# Altium PCB main.PcbDoc (part 16 of 16)
Units mil, origin at the board's own origin, x right, y up, seen from the top; angles counter-clockwise.
Board outline 8394.75 x 5164.44 mil, 7 copper layers (Top Layer 1, Layer 2, Layer 3, Unused, Layer 4_pow, Layer 5_gnd, Bottom 6+gnd), stack 64.043 mil thick; 364 components, 409 nets, 1932 pads, 1061 vias.
Unrouted connection lines stored in the file: 2.
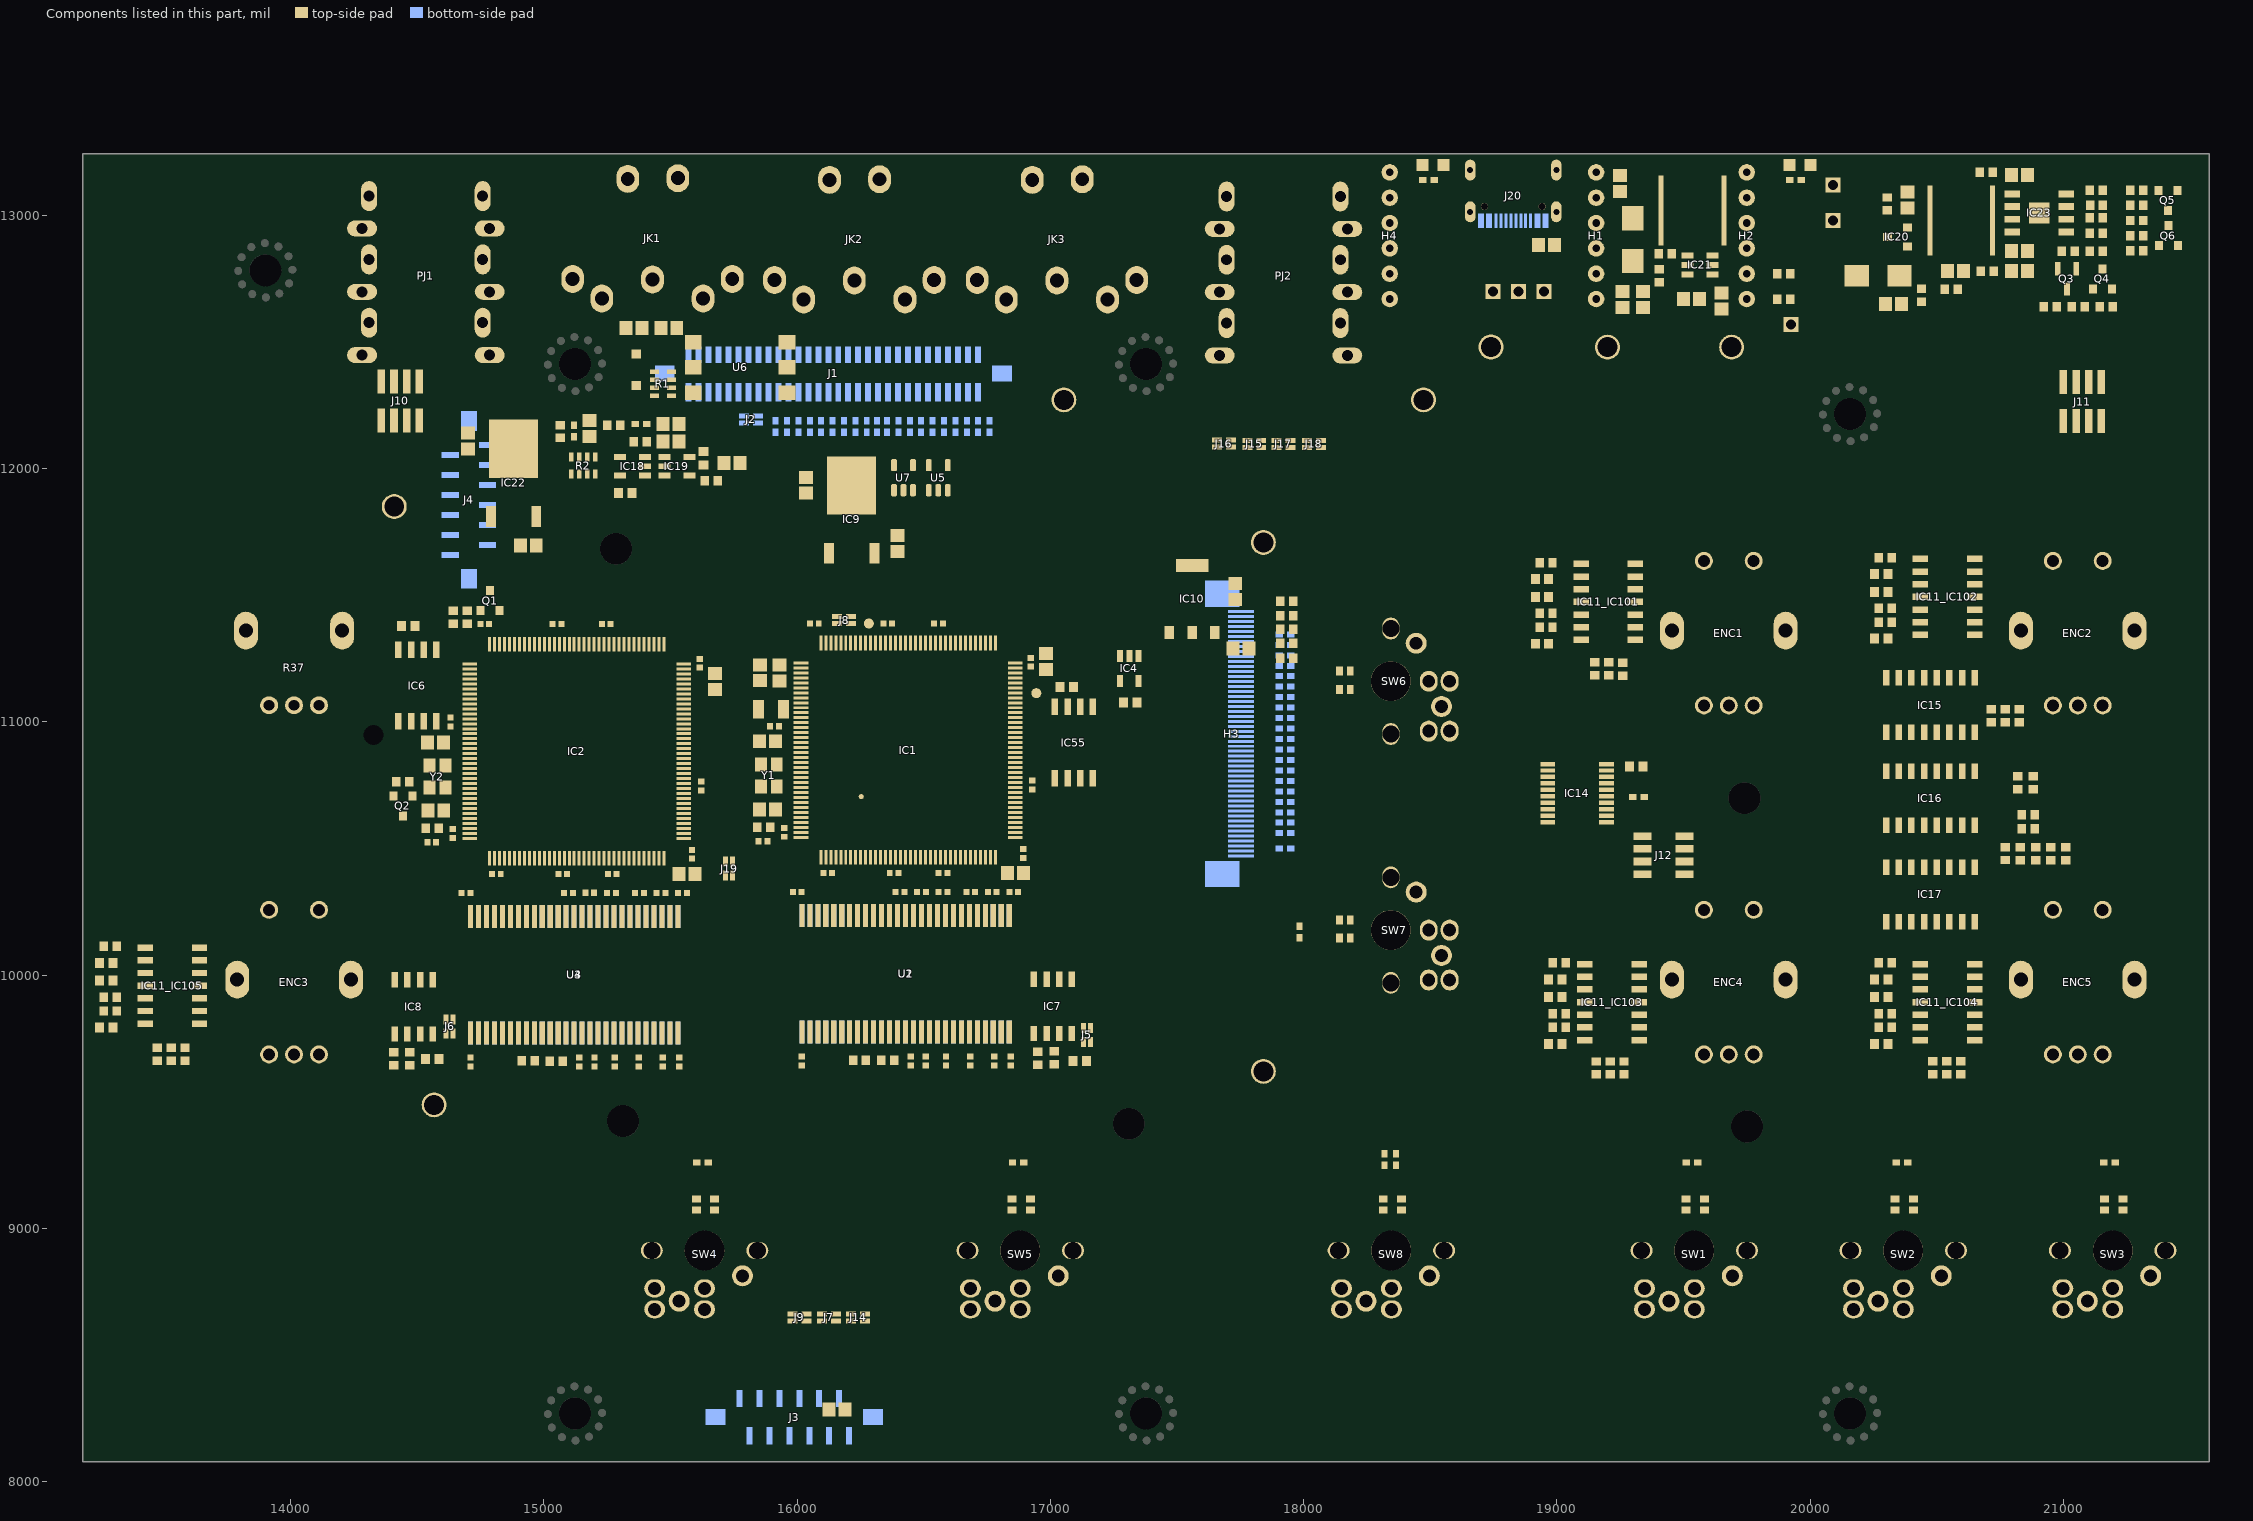
[diagram p19: the components of this part, seen from the top]

## Silkscreen, mask and mechanical layers (free items; w line width, h text height) (continued)
Bottom Overlay:
  circle w15: c18473.25,12271.89 r88.03
  circle w15: c17053.25,12271.89 r88.03
  circle w15: c14409.45,11850.39 r88.03
  circle w15: c14566.93,9488.19 r88.03
  circle w15: c17841.03,9620.49 r88.03
  circle w15: c17841.01,11708.99 r88.03
  lines w5: 15222.49,11575.81 15347.5,11575.81 ; 15222.49,11575.81 15347.5,11792.34 ; 15222.49,11575.81 15205.74,11604.82 15159.98,11684.07 15222.49,11792.34 ; 15222.49,11575.84 15347.5,11575.84 ; 15222.49,11575.84 15347.5,11792.38 ; 15222.49,11575.84 15205.74,11604.85 15159.98,11684.11 15222.49,11792.38 ; 15222.49,11792.34 15347.5,11792.34 ; 15222.49,11792.34 15347.5,11575.81 ; 15222.49,11792.38 15347.5,11792.38 ; 15222.49,11792.38 15347.5,11575.84 ; 15250.69,9315.82 15375.7,9532.36 ; 15250.69,9315.82 15375.7,9315.82 ; 15250.69,9315.82 15233.94,9344.83 15188.18,9424.09 15250.69,9532.36 ; 15250.69,9532.36 15375.7,9315.82 ; 15250.69,9532.36 15375.7,9532.36 ; 15347.5,11575.81 15410.01,11684.07 15347.5,11792.34 ; 15347.5,11575.84 15410.01,11684.11 15347.5,11792.38 ; 15375.7,9315.82 15438.21,9424.09 15375.7,9532.36 ; 17246.83,9305.34 17371.84,9305.34 ; 17246.83,9305.34 17371.84,9521.88 ; 17246.83,9305.34 17230.08,9334.35 17184.32,9413.61 17246.83,9521.88 ; 17246.83,9521.88 17371.84,9305.34 ; 17246.83,9521.88 17371.84,9521.88 ; 17371.84,9305.34 17434.35,9413.61 17371.84,9521.88 ; 19625.99,9403.02 19688.5,9511.29 ; 19625.99,9403.02 19671.75,9323.76 19688.5,9294.75 ; 19625.99,9402.98 19671.75,9323.72 19688.5,9294.71 ; 19625.99,9402.98 19688.5,9511.25 ; 19678.42,10590.59 19803.44,10807.13 ; 19678.42,10590.59 19803.44,10590.59 ; 19678.42,10590.59 19661.67,10619.6 19615.91,10698.86 19678.42,10807.13 ; 19678.42,10807.13 19803.44,10807.13 ; 19678.42,10807.13 19803.44,10590.59 ; 19688.5,9294.71 19813.52,9511.25 ; 19688.5,9294.71 19813.52,9294.71 ; 19688.5,9294.75 19813.52,9511.29 ; 19688.5,9294.75 19813.52,9294.75 ; 19688.5,9511.25 19813.52,9511.25 ; 19688.5,9511.25 19813.52,9294.71 ; 19688.5,9511.29 19813.52,9511.29 ; 19688.5,9511.29 19813.52,9294.75 ; 19803.44,10590.59 19865.94,10698.86 19803.44,10807.13 ; 19813.52,9294.71 19876.03,9402.98 ; 19813.52,9294.75 19876.03,9403.02 ; 19813.52,9511.25 19876.03,9402.98 ; 19813.52,9511.29 19876.03,9403.02 ; 13775.38,12783.41 13837.88,12891.68 13962.9,12891.68 14025.41,12783.41 13962.9,12675.14 13837.88,12675.14 13821.13,12704.15 13775.38,12783.41 ; 14997.87,12413.03 15043.63,12333.77 15060.37,12304.76 15185.39,12304.76 15247.9,12413.03 15185.39,12521.29 15060.37,12521.29 14997.87,12413.03 ; 14997.98,8269.72 15043.74,8190.47 15060.49,8161.46 15185.51,8161.46 15248.02,8269.72 15185.51,8377.99 15060.49,8377.99 14997.98,8269.72 ; 17252.68,12413.03 17298.44,12333.77 17315.19,12304.76 17440.21,12304.76 17502.71,12413.03 17440.21,12521.29 17315.19,12521.29 17252.68,12413.03 ; 17252.98,8270 17298.74,8190.74 17315.49,8161.73 17440.51,8161.73 17503.02,8270 17440.51,8378.27 17315.49,8378.27 17252.98,8270 ; 18653.24,12477.11 18676.36,12540.95 18738.24,12572.11 18803.98,12540.95 18828.21,12480.3 18803.24,12417.11 18743.45,12392.33 18678.24,12417.11 18653.24,12477.11 ; 19113.08,12476.8 19136.2,12540.63 19198.08,12571.8 19263.82,12540.63 19288.05,12479.99 19263.08,12416.8 19203.29,12392.01 19138.08,12416.8 19113.08,12476.8 ; 19603.08,12476.8 19626.2,12540.63 19688.08,12571.8 19753.82,12540.63 19778.05,12479.99 19753.08,12416.8 19693.29,12392.01 19628.08,12416.8 19603.08,12476.8 ; 20032.46,8269.72 20078.22,8190.47 20094.97,8161.46 20219.99,8161.46 20282.5,8269.72 20219.99,8377.99 20094.97,8377.99 20032.46,8269.72 ; 20032.46,12215.72 20094.97,12323.99 20219.99,12323.99 20282.5,12215.72 20219.99,12107.45 20094.97,12107.45 20078.22,12136.46 20032.46,12215.72
  lines w10: 18279.81,12380 18279.81,13239.99 19829.81,13239.99 19829.81,12380 18279.81,12380
Board Shape:
  lines w10: 13180.25,8079.59 13180.25,8670.67 13180.25,13244.04 21496.06,13244.04 21575,13244.04 21575,8079.59 21496.06,8079.59 13180.25,8079.59 ; 18274.81,12549.99 19824.81,12549.99 19824.81,13244.99 18274.81,13244.99 18274.81,12549.99
Mechanical 3:
  circle w7.87: c16279.76,8913.11 r125.02
  circle w7.87: c18939.51,8913.11 r125.02
  circle w7.87: c13698.79,8913.11 r125.02
  circle w7.87: c14013.79,10698.88 r125.02
  circle w7.87: c13708,12275.94 r125.02
  circle w0.5: c13708,12275.94 r59.06
  circle w0.5: c20205.5,11839.94 r125.02
  circle w0.5: c18344.49,11708.99 r125.02
  circle w0.5: c18344.49,11708.99 r59.06
  circle w0.5: c18344.49,9549 r59.06
  circle w0.5: c18344.49,9549 r125.02
  circle w0.5: c20205.5,11839.94 r59.06
  circle w0.5: c13698.79,8913.11 r59.06
  circle w0.5: c21109.8,10698.88 r125.02
  circle w0.5: c21109.8,10698.88 r59.06
  circle w0.5: c19740.92,10698.88 r125.02
  circle w0.5: c18939.51,8913.11 r59.06
  circle w0.5: c17655.66,8913.11 r125.02
  circle w0.5: c17655.66,8913.11 r59.06
  circle w0.5: c16279.76,8913.11 r59.06
  circle w0.5: c14013.79,10698.88 r59.06
  circle w0.5: c20751.86,9440.57 r59.06
  lines w0.5: 13180.25,8079.59 21507.89,8079.59 21507.89,13244.04 13180.25,13244.04 13180.25,8079.59 ; 20626.84,9440.57 20672.6,9361.31 20689.35,9332.3 20814.37,9332.3 20876.87,9440.57 20814.37,9548.84 20689.35,9548.84 20626.84,9440.57
Outline:
  circle w0.5: c15285,11684.09 r62.99
  circle w0.5: c15285,11684.09 r62.99
  circle w10: c14013.78,11360.55 r59.06
  circle w10: c18344.49,11160.81 r59.06
  circle w10: c18344.49,10178.22 r59.06
  circle w10: c14013.78,9982.6 r59.06
  circle w10: c15634.53,8913.12 r59.06
  circle w10: c16881.21,8913.12 r59.06
  circle w0.5: c14210.88,12441.31 r19.68
  circle w0.5: c14210.88,12086.98 r19.68
  circle w0.5: c14683.32,12441.31 r19.68
  circle w0.5: c14683.32,12086.98 r19.68
  circle w0.5: c15155.76,12441.31 r19.68
  circle w0.5: c15155.76,12086.98 r19.68
  circle w0.5: c15628.2,12441.31 r19.68
  circle w0.5: c15628.2,12086.98 r19.68
  circle w0.5: c16100.64,12441.31 r19.68
  circle w0.5: c16100.64,12086.98 r19.68
  circle w0.5: c16573.08,12441.31 r19.68
  circle w0.5: c16573.08,12086.98 r19.68
  circle w0.5: c17045.52,12441.31 r19.68
  circle w0.5: c17045.52,12086.98 r19.68
  circle w0.5: c17517.96,12441.31 r19.68
  circle w0.5: c17517.96,12086.98 r19.68
  circle w0.5: c17990.4,12441.31 r19.68
  circle w0.5: c17990.4,12086.98 r19.68
  circle w0.5: c18462.85,12441.31 r19.68
  circle w0.5: c18462.85,12086.98 r19.68
  circle w0.5: c18935.29,12441.31 r19.68
  circle w0.5: c18935.29,12086.98 r19.68
  circle w0.5: c19407.73,12441.31 r19.68
  circle w0.5: c19407.73,12086.98 r19.68
  circle w0.5: c19880.17,12441.31 r19.68
  circle w0.5: c19880.17,12086.98 r19.68
  circle w0.5: c20352.61,12441.31 r19.68
  circle w0.5: c20352.61,12086.98 r19.68
  circle w0.5: c20825.05,12441.31 r19.68
  circle w0.5: c20825.05,12086.98 r19.68
  circle w0.5: c21297.49,12441.31 r19.68
  circle w0.5: c21297.49,12086.98 r19.68
  circle w10: c21194.5,8913.12 r59.06
  circle w10: c20367.72,8913.12 r59.06
  circle w10: c19542.61,8913.12 r59.06
  circle w10: c21056.7,11360.55 r59.06
  circle w10: c21056.7,9982.6 r59.06
  circle w10: c19678.75,9982.6 r59.06
  circle w10: c19678.75,11360.55 r59.06
  lines w10: 13180.25,8670.67 13180.25,13244.04 21574.8,13244.04 21574.8,8670.67 ; 13180.25,8670.67 13180.25,8079.59 21574.8,8079.59 21574.8,8670.67 ; 13180.25,8670.67 21574.8,8670.67 ; 18935.29,12086.98 18935.29,12086.98
Mechanical 6:
  circle w0.5: c853.9,704.79 r23.62
  circle w0.5: c1113.74,826.84 r23.62
  circle w0.5: c853.9,224.48 r23.62
  circle w0.5: c1113.74,346.52 r23.62
  circle w0.5: c1113.74,582.74 r23.62
  circle w0.5: c853.9,464.63 r23.62
  circle w0.5: c700.36,582.74 r23.62
  circle w0.5: c710.2,421.33 r23.62
  circle w0.5: c700.36,259.91 r23.62
  circle w0.5: c566.5,464.63 r23.62
  circle w0.5: c566.5,669.36 r23.62
  circle w0.5: c405.08,307.15 r41.34
  lines w0.5: 0.25,464.63 1366.32,464.63 ; 28.27,0.25 28.27,927.81 129.49,927.81 129.49,0.25 28.27,0.25

## Text inside footprints (layer, text, board x,y; h text height)
H3: Bottom Overlay "1" at 17833.57,10466.71 h25 r270; Bottom Overlay "5" at 17833.57,10545.45 h25 r270; Bottom Overlay "10" at 17833.57,10643.87 h25 r270; Bottom Overlay "15" at 17833.57,10742.3 h25 r270; Bottom Overlay "20" at 17833.57,10840.73 h25 r270; Bottom Overlay "25" at 17833.57,10939.15 h25 r270; Bottom Overlay "30" at 17833.57,11037.58 h25 r270; Bottom Overlay "35" at 17833.57,11136 h25 r270; Bottom Overlay "40" at 17833.57,11234.43 h25 r270; Bottom Overlay "45" at 17833.57,11332.85 h25 r270; Bottom Overlay "50" at 17833.57,11431.28 h25 r270